# Altium PCB air qulity monitor.PcbDoc
Units mil, origin at the board's own origin, x right, y up, seen from the top; angles counter-clockwise.
Board outline 2860 x 2155 mil, 2 copper layers (Top Layer, Bottom Layer); 23 components, 21 nets, 103 pads, 17 vias.
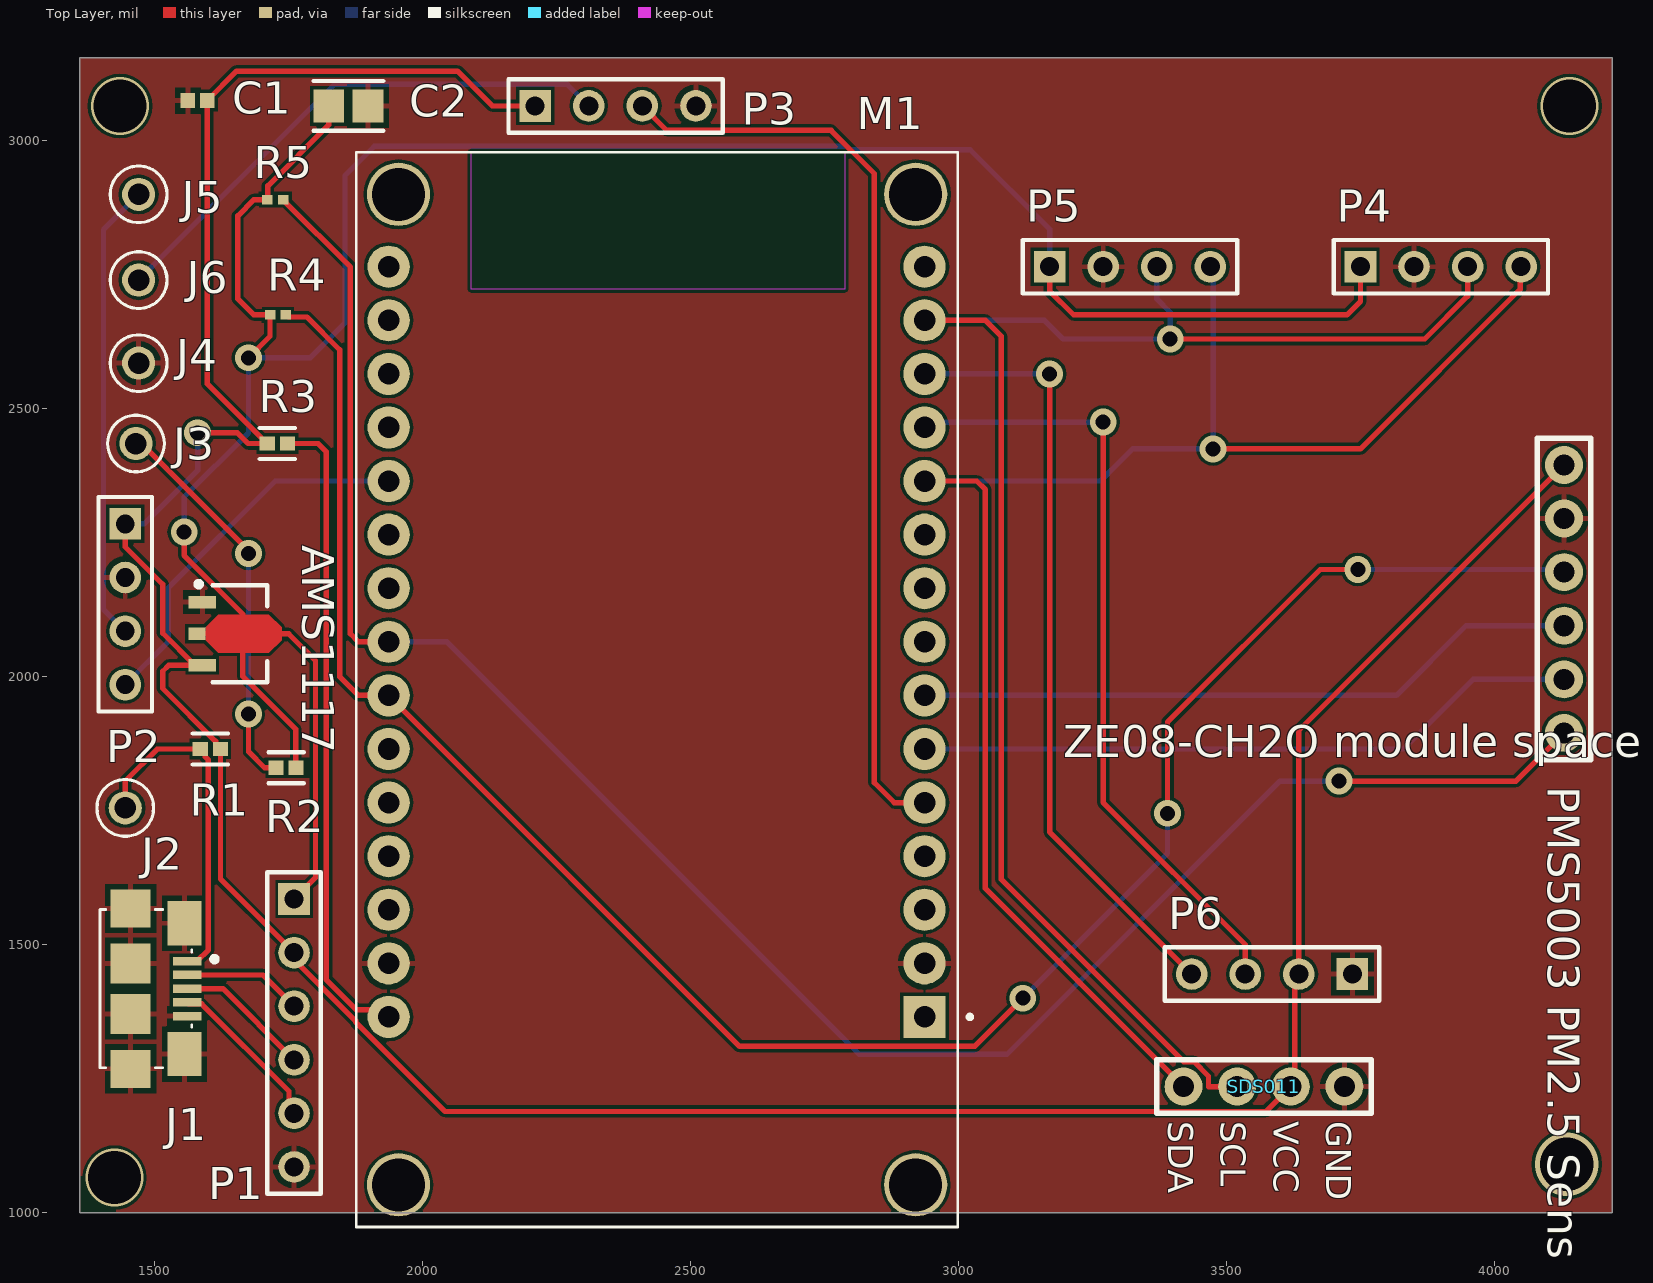
[diagram p0: Top Layer view]
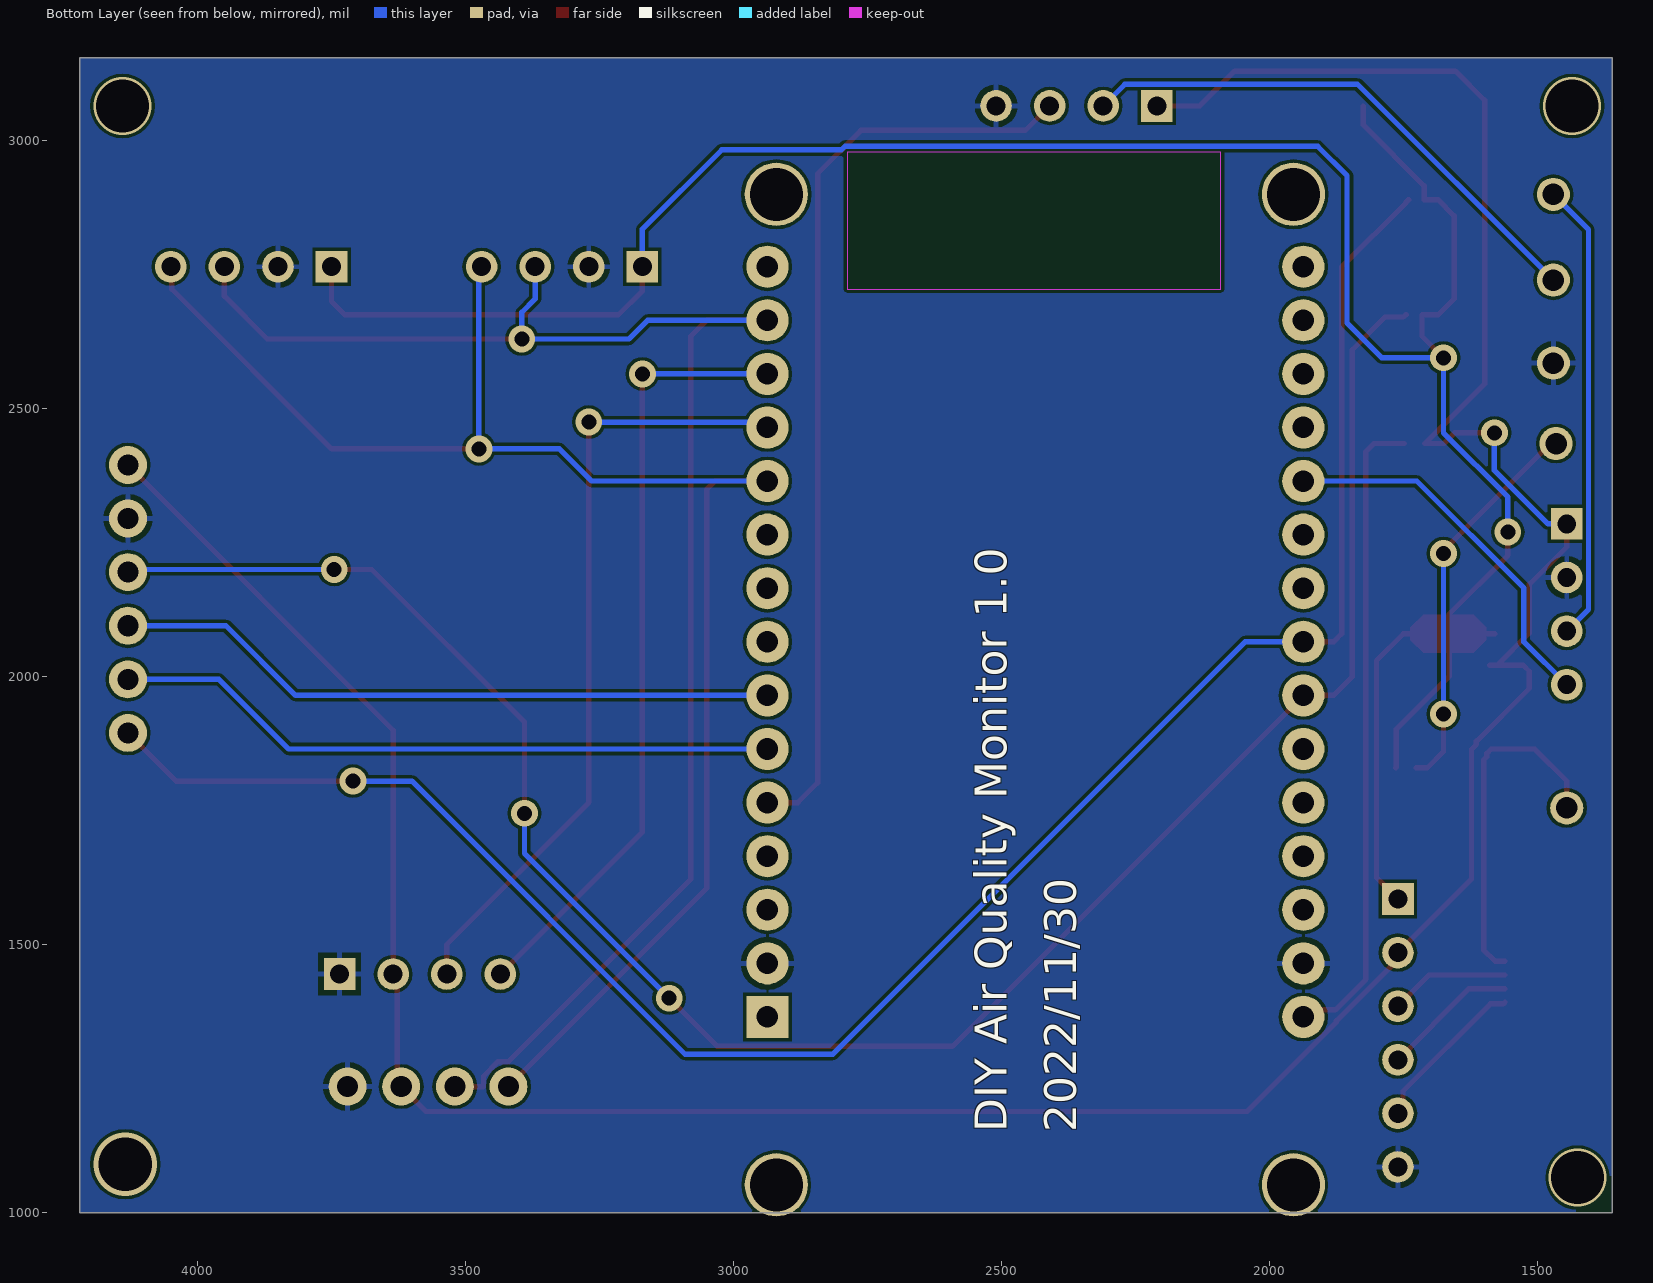
[diagram p1: Bottom Layer view, seen from below]
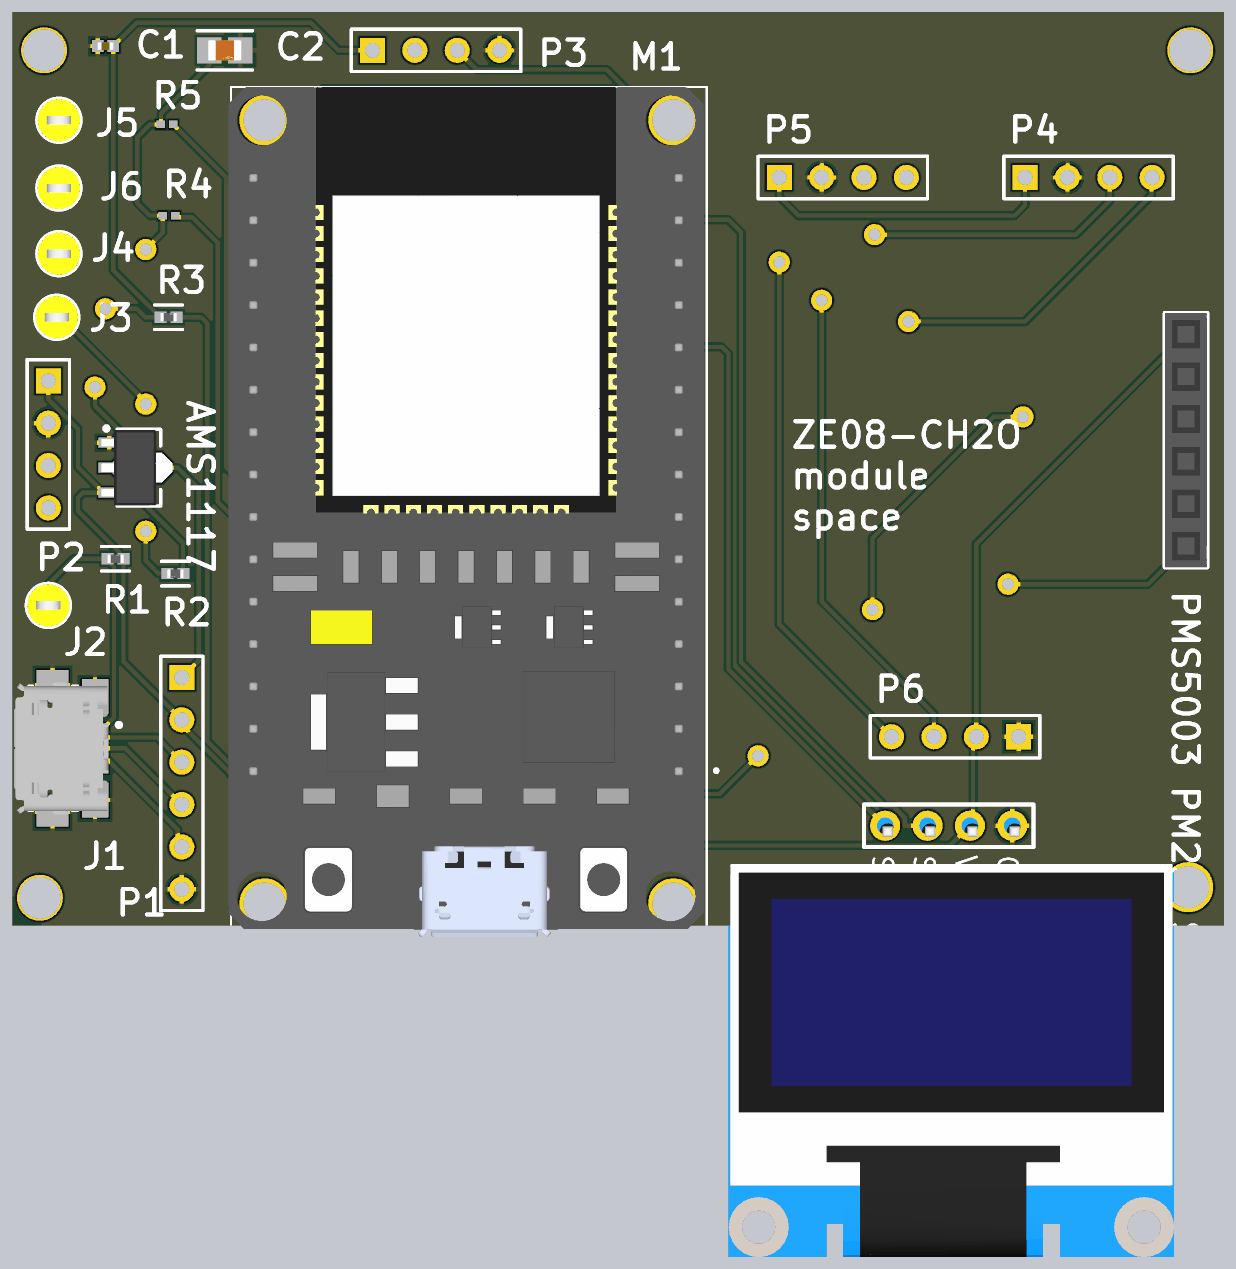
[diagram p2: 3D render of the assembled board from above, using the file's embedded part models]

## Layer stack, top to bottom
Top Solder: solder mask 0.4, Solder Resist, Dk 3.5
Top Layer: signal copper 1.4
Dielectric 1: dielectric 12.6, FR-4, Dk 4.8
Bottom Layer: signal copper 1.4
Bottom Solder: solder mask 0.4, Solder Resist, Dk 3.5

## Board outline
1360,1000 4220,1000 4220,3155 1360,3155

## Design rules (kind name [scope] priority, off if disabled: settings)
Clearance [All] p1: gap=5.98 ignorepadtopadclearanceinfootprint=FALSE
MinimumSolderMaskSliver [All] p1: minsoldermaskwidth=0.98
PolygonConnect [All] p1: connectstyle=Relief reliefconductorwidth=10 reliefentries=4 polygonreliefangle="90 Angle" airgapwidth=10
RoutingVias [All] p1: holewidth=28 width=50 viastyle="Through Hole" minholewidth=28 minwidth=50 maxholewidth=28 maxwidth=50
SilkToSilkClearance [All] p1: silktosilkclearance=1
SilkToSolderMaskClearance [IsPad] p1: minsilkscreentomaskgap=5 clearancetoexposedcopper=TRUE
SolderMaskExpansion [All] p1: expansion=4.02
Width [All] p1: maxlimit=12.01 minlimit=5.98 preferedwidth=10
27 further rules are at their usual default settings.

## Classes and differential pairs
component class "air qulity monitor": J5 J6 M1 P1 P2 P3 P4 P5 P6 "PMS5003 PM2.5 Sensor" R3 R4 R5 SDS011
component class "5V to 3.3V regulator": AMS1117 C1 C2 J1 J2 J3 J4 J? R1 R2

## Components (designator, comment, footprint, x,y, rotation, side; value= is the part's Value field where it differs from the comment)
AMS1117 "IC1" SOT89-150P350X150-3N 1650,2080 r0 top
C1 "10uF" CAPC1005X70N 1580,3075 r0 top
C2 "22uF" FP-GRM219-0_2-0_15-IPC_A 1861.45,3065 r0 top
J1 "10118192-0001LF" AMPHENOL_10118192-0001LF 1560.32,1417.76 r270 top
J2 "5004" FP-5004-MFG 1445,1755 r0 top
J3 "5004" FP-5004-MFG 1465,2435 r0 top
J4 "5004" FP-5004-MFG 1470,2585 r0 top
J5 "5004" FP-5004-MFG 1470,2900 r0 top
J6 "5004" FP-5004-MFG 1470,2740 r0 top
M1 "ESP32-WROOM-32" ESP32-DEVKIT-V1 2460.24,1968.94 r180 top
P1 "Header 6" HDR1X6 1760,1585 r270 top
P2 "MQ7 sensor Header" HDR1X4 1445,2285 r270 top
P3 "MQ131 sensor Header" HDR1X4 2210,3065 r0 top
P4 "Si7021 Sensor Header" HDR1X4 3750,2765 r0 top
P5 "SGP30 Sensor Header" HDR1X4 3170,2765 r0 top
P6 "ZE08-CH2O sensor Header" HDR1X4 3735,1445 r180 top
"PMS5003 PM2.5 Sensor" "PMS5003 PM2.5 Sensor" "PMS5003 PM2.5 Sensor" 4130,2145 r0 top
R1 "0R" FP-RC0402-0_4-IPC_A 1603.84,1865 r0 top
R2 "0R" FP-RC0402-0_4-IPC_A 1745,1830 r180 top
R3 "0R" FP-RC0402-0_4-IPC_A 1728.84,2435 r0 top
R4 "10kΩ" RESC1005X40X25LL05T10 1730,2675 r180 top value=10kO
R5 "10kΩ" RESC1005X40X25LL05T10 1724.76,2890 r180 top value=10kO
SDS011 "Pin Header x4 - Display" dispay 3720,1235 r270 top

## Footprints (in the part's own frame and the unit in brackets; to place one, negate y for a bottom-side part, rotate by r counter-clockwise, add the part's x,y. Pads: shape width x height; smd on the part's side, far side on the other; paste and mask are expansions set on the pad)
AMPHENOL_10118192-0001LF [mm]
  rect 0.4x1.35 smd: 1(-1.3,0) 2(-0.65,0) 3(0,0) 4(0.65,0) 5(1.3,0)
  rect 2.1x1.6 smd: SH1(-3.1,-0.125) SH2(3.1,-0.125)
  rect 1.8x1.9 smd: SH3(-3.8,-2.675) SH6(3.8,-2.675)
  rect 1.9x1.9 smd: SH4(-1.2,-2.675) SH5(1.2,-2.675)
  silkscreen extent -3.75,-4.13 3.75,1.4, body extent -3.94,-4.99 3.98,0.67, height 3.09
CAPC1005X70N [mm]
  rect 0.69x0.72 smd: 1(-0.46,0) 2(0.46,0)
  body extent -0.5,-0.25 0.5,0.25, height 0.7
dispay [mm] "Pin Header x4 - Display"
  round 1.8 hole 1: GND(0,0) SCL(0,-5.08) SDA(0,-7.62) VCC(0,-2.54)
  silkscreen extent -1.27,-8.89 1.27,1.27, body extent -2,-17 25.86,9.7, height 1.47
ESP32-DEVKIT-V1 [mm]
  rect 2x2 hole 1.02: 1(-12.098,15.341)
  round 2 hole 1.02: 2(-12.098,12.801) 3(-12.098,10.261) 4(-12.098,7.721) 5(-12.098,5.181) 6(-12.098,2.641) 7(-12.098,0.101) 8(-12.098,-2.439) 9(-12.098,-4.979) 10(-12.098,-7.519) 11(-12.098,-10.059) 12(-12.098,-12.599) 13(-12.098,-15.139) 14(-12.098,-17.679) 15(-12.098,-20.219) 16(13.302,-20.219) 17(13.302,-17.679) 18(13.302,-15.139) 19(13.302,-12.599) 20(13.302,-10.059) 21(13.302,-7.519) 22(13.302,-4.979) 23(13.302,-2.439) 24(13.302,0.101) 25(13.302,2.641) 26(13.302,5.181) 27(13.302,7.721) 28(13.302,10.261) 29(13.302,12.801) 30(13.302,15.341)
  round 3 hole 2.517 unplated: ""(-11.678,23.301) ""(-11.678,-23.649) ""(12.832,23.301) ""(12.832,-23.649)
  Keep-Out Layer region: 9.382,-25.649 -8.308,-25.649 -8.308,-19.159 9.382,-19.159
  Keep-Out Layer region: 9.382,-25.649 -8.308,-25.649 -8.308,-19.159 9.382,-19.159
  Keep-Out Layer region: 9.382,-25.649 -8.308,-25.649 -8.308,-19.159 9.382,-19.159
  silkscreen extent -14.35,-25.65 14.83,25.3, body extent -13.5,-25.63 15,25.3, height 7.2
FP-5004-MFG [mm]
  round 1.57 hole 1.02 paste-1000 mask+0: 1(0,0)
  silkscreen extent -1.35,-1.34 1.35,1.34, body extent -1.45,-1.45 1.45,1.45, height 0.25
FP-GRM219-0_2-0_15-IPC_A [mil]
  rect 57.27x61.27 smd paste+0 mask+0: 1(-36.45,0) 2(36.45,0)
  silkscreen extent -65,-46 65,46, body extent -85,-50 85,50, height 10
FP-RC0402-0_4-IPC_A [mil]
  rect 28.16x26.48 smd paste+0 mask+0: 1(-18.84,0) 2(18.84,0)
  silkscreen extent -33,-29 33,29, body extent -41,-21 41,21, height 10
HDR1X4 [mm] "Connector; Header; 4 Position"
  rect 1.5x1.5 hole 0.9: 1(0,0)
  round 1.5 hole 0.9: 2(2.54,0) 3(5.08,0) 4(7.62,0)
  silkscreen extent -1.27,-1.27 8.89,1.27
HDR1X6 [mm] "Connector; Header; 6 Position"
  rect 1.5x1.5 hole 0.9: 1(0,0)
  round 1.5 hole 0.9: 2(2.54,0) 3(5.08,0) 4(7.62,0) 5(10.16,0) 6(12.7,0)
  silkscreen extent -1.27,-1.27 13.97,1.27
"PMS5003 PM2.5 Sensor" [mm] "PMS5003 PM2.5 Sensor"
  round 1.8 hole 1: GND(0,3.81) RESET(0,-6.35) RX(0,-1.27) SET(0,1.27) TX(0,-3.81) VCC(0,6.35)
  silkscreen extent -1.27,-7.62 1.27,7.62, body extent -1.27,-7.62 1.27,7.62, height 8.5
RESC1005X40X25LL05T10 [mm] "Chip Resistor, 2-Leads, Body 1.00x0.50mm, IPC High Density"
  rect 0.5x0.45 smd: 1(-0.375,0) 2(0.375,0)
  body extent -0.53,-0.27 0.53,0.28, height 0.4
SOT89-150P350X150-3N [mm] "SOT89, 3-Leads, Body 4.50x2.50mm, Pitch 1.50mm, Lead Span 3.5mm, IPC Medium Density"
  rect 1.3x0.6 smd: 1(-1.55,1.5) 3(-1.55,-1.5)
  rect 0.8x0.6 smd: 2(-1.8,0)
  Top Layer region: -1.4,0.3 -0.8,0.9 1.6,0.9 2.2,0.3 2.2,-0.3 1.6,-0.9 -0.8,-0.9 -1.4,-0.3
  silkscreen extent -1.85,-2.3 1.53,2.47, body extent -2.02,-2.27 2.22,2.27, height 1.5

## Part data
AMS1117: library part IC?, "75dB@(120Hz) 1A 1.25V@(1A) ±125?@(Tj) Fixed 3.3V~3.3V Positive 1 20V SOT-89 Linear Voltage Regulators (LDO) ROHS", LCSC Part #=C2904742, Manufacturer=YONGYUTAI, Mfr. Part #=AMS1117-3.3, Package=SOT-89, Datasheet=https://datasheet.lcsc.com/lcsc/2110121330_YONGYUTAI-AMS1117-3-3_C2904742.pdf
C1: library part CL05A106MQ5NUNC, "6.3V 10uF X5R ±20% 0402 Multilayer Ceramic Capacitors MLCC - SMD/SMT ROHS", LCSC Part #=187-CL05A106MQ5NUNC, Manufacturer="Samsung Electro-Mechanics", Package=0402, Datasheet Link=https://datasheet.datasheetarchive.com/originals/distributors/Datasheets-DGA10/2406160.pdf, Mfr. Part #=CL05A106MQ5NUNC
C2: library part CMP-06035-056251-1, "Chip Multilayer Ceramic Capacitors for General Purpose, 0805, 22uF, X5R, 15%, 20%, 16V", LCSC Part #=C162295, Manufacturer="Murata Electronics", Mfr. Part #=GRM219R61C226ME15L, Package=0805, Datasheet=https://datasheet.lcsc.com/lcsc/1811141821_Murata-Electronics-GRM219R61C226ME15L_C162295.pdf
J1: "Single Port 5 Contact Horizontal Right Angle Shielded Micro B USB 2.0 Connector", Package=None, Availability=Unavailable, MP=10118192-0001LF, Price=None
J2 J3 J4 J5 J6: library part CMP-2000-05575-2, "PC TEST POINT MINIATURE YELLOW", LCSC Part #=C2906762, Manufacturer=Keystone, ComponentLink2Description=Datasheet, ComponentLink2URL=https://www.keyelco.com/product-pdf.cfm?p=1313, Datasheet=https://datasheet.lcsc.com/lcsc/2201121200_Keystone-5004_C2906762.pdf, Mfr. Part #=5004, Package=5004
M1: library part ESP32-DEVKIT-V1, "Dual core, Wi-Fi: 2.4 GHz up to 150 Mbits/s,BLE (Bluetooth Low Energy) and legacy Bluetooth, 32 bits, Up to 240 MHz"
P1: "Header, 6-Pin", LatestRevisionDate=17-Jul-2002, LatestRevisionNote="Re-released for DXP Platform.", Publisher="Altium Limited"
P2 P3 P4 P5 P6: library part "Header 4", "Header, 4-Pin", LatestRevisionDate=17-Jul-2002, LatestRevisionNote="Re-released for DXP Platform.", Publisher="Altium Limited"
R1 R2 R3: library part CMP-2002-07342-2, "RES SMD 0 OHM JUMPER 1/16W 0402", LCSC Part #=C106231, Manufacturer=Yageo, Mfr. Part #=RC0402FR-070RL, Package=0402, Datasheet=https://www.lcsc.com/product-detail/Chip-Resistor-Surface-Mount_YAGEO-RC0402FR-070RL_C106231.html
R4 R5: library part CMP-2002-07353-1, "62.5mW 50V ±100ppm/? ±1% -55?~+155? 10kO 0402 Chip Resistor - Surface Mount ROHS", LCSC Part #=C60490, Manufacturer="Yageo / Phycomp", Mfr. Part #=RC0402FR-0710KL, Package=0402, Datasheet=https://datasheet.lcsc.com/lcsc/1809301715_YAGEO-RC0402FR-0710KL_C60490.pdf

## Via types
v1: diameter 50, hole 28, Top Layer to Bottom Layer, 13 vias
v2: diameter 108.11, hole 99.11, Top Layer to Bottom Layer, 3 vias
v3: diameter 118.11, hole 99.11, Top Layer to Bottom Layer, 1 vias

## Nets (pads, with @x,y where several pads share a name; then routed paths per layer and width w, separated by ;. In a path a pad name is that pad's centre, name@x,y a point inside that pad or via, vN(x,y) a via of type N, cw(c..) or ccw(c..) an arc to the next point about the centre after c; other vN are vias at no path point)
3.3V: AMS1117.2 C2.1 P1.1 P4.1 P5.1 R2.1 R4.2 R5.2 | length 4892
  Top Layer w10: v1(1555,2270) 1555,2225.97 1664.57,2116.4 1664.57,2080 ; AMS1117.2 1664.57,2080 ; v1(1675,2595) 1715.24,2635.24 R4.2 1685,2675 1655,2705 1655,2860 1685,2890 R5.2 1710.98,2890 1710.98,2915.98 1825,3030 C2.1 ; P1.1 1800,1625 1800,2030 1750,2080 1664.57,2080 ; R2.1 1763,1830.84 1763,1902 1664.57,2000.43 1664.57,2080 ; P5.1 3170,2720 3215,2675 3725,2675 3750,2700 P4.1
  Bottom Layer w10: v1(1555,2270) 1555,2335 1675,2455 v1(1675,2595) 1790,2595 1855,2660 1855,2935 1909.72,2989.72 2791.87,2989.72 2798.31,2983.29 3021.71,2983.29 3170,2835 P5.1
5V: "PMS5003 PM2.5 Sensor.VCC" AMS1117.3 C1.2 P1.2 P2.1 P3.1 P6.2 R1.2 R3.1 SDS011.VCC | length 6138
  Top Layer w10: P2.1 1445,2242.29 1515,2172.29 1515,2081.14 AMS1117.3@1575.2,2020.94 ; v1(1580,2455) 1654.3,2455 1674.3,2435 R3.1@1709.16,2435 ; AMS1117.3 AMS1117.3@1575.2,2020.94 ; R3.1 R3.1@1709.16,2435 ; P3.1 2130,3065 2065,3130 1652.52,3130 1598.11,3075.59 C1.2 1598.11,2546.05 R3.1@1709.16,2435 ; 4130,2395 3635,1900 P6.2 3627.5,1437.5 3627.5,1242.5 SDS011.VCC 3573.58,1188.58 2041.7,1188.58 1874.84,1355.45 1874.84,1357.56 1760,1472.39 P1.2 1622.68,1622.32 R1.2 1621.84,1865 1613.6,1873.24 1613.6,1879.25 1515,1977.85 1515,2010.09 1525.86,2020.94 AMS1117.3@1575.2,2020.94
  Bottom Layer w10: P2.1 1480,2285 1580,2385 v1(1580,2455)
D+: J1.3 P1.4 | length 254.7
  Top Layer w10: J1.3 1627.24,1417.76 P1.4
D-: J1.2 P1.3 | length 223.9
  Top Layer w10: J1.2 1701.65,1443.35 P1.3
DOUT1: J5.1 P2.3 | length 858.9
  Bottom Layer w10: P2.3 1404.49,2125.51 1404.49,2834.49 J5.1
DOUT2: J6.1 P3.2 | length 1008.2
  Bottom Layer w10: J6.1 1835.51,3105.51 2269.49,3105.51 P3.2
GND: "PMS5003 PM2.5 Sensor.GND" AMS1117.1 C1.1 C2.2 J1.5 J1.SH1 J1.SH2 J1.SH3 J1.SH4 J1.SH5 J1.SH6 J4.1 M1.2 M1.29 P1.6 P2.2 P3.4 P4.2 P5.2 P6.1 SDS011.GND
ID: J1.4 P1.5 | length 304.2
  Top Layer w10: J1.4 1563.19,1389.29 1587.58,1389.29 1750.61,1226.26 1750.61,1194.39 P1.5
NetJ1_1: J1.1 J2.1 R1.1 | length 645
  Top Layer w10: J2.1 1445,1805 1505,1865 R1.1 1585.84,1865 1594.08,1856.76 1594.08,1850.75 1600,1844.83 1600,1489.92 1579.02,1468.94 J1.1
NetJ3_1: J3.1 R2.2 | length 731.4
  Top Layer w10: J3.1 1475,2435 1675,2235 v1(1675,2230) ; v1(1675,1930) 1675,1860 1705,1830 R2.2
  Bottom Layer w10: v1(1675,1930) v1(1675,2230)
NetM1_5: M1.5 P3.3 | length 1730.8
  Top Layer w10: P3.3 2455.55,3019.45 2762.15,3019.45 2842.76,2938.83 2842.76,1802.24 2880.04,1764.96 M1.5
NetM1_6: "PMS5003 PM2.5 Sensor.TX" M1.6 | length 1247.3
  Bottom Layer w10: M1.6 3829.96,1864.96 3960,1995 4130,1995
NetM1_7: "PMS5003 PM2.5 Sensor.RX" M1.7 | length 1247.3
  Bottom Layer w10: M1.7 3817.36,1964.96 3947.39,2095 4130,2095
NetM1_12: M1.12 P6.3 | length 1491.6
  Top Layer w10: M1.12 M1.12@2946.57,2475 ; v1(3270,2475) 3270,1765 3535,1500 P6.3
  Bottom Layer w10: M1.12 2946.57,2475 v1(3270,2475)
NetM1_13: M1.13 P6.4 | length 1463.2
  Top Layer w10: v1(3170,2565) 3170,1710 P6.4
  Bottom Layer w10: M1.13 v1(3170,2565) v1(3170,2565)
NetM1_20: M1.20 P2.4 | length 707.5
  Bottom Layer w10: P2.4 1525,2065 1525,2165 1724.96,2364.96 M1.20
NetM1_23: "PMS5003 PM2.5 Sensor.RESET" M1.23 R5.1 | length 3746.2
  Top Layer w10: R5.1 1740.51,2890 1744.37,2886.14 1744.37,2885.16 1865,2764.53 1865,2080 1880.04,2064.96 M1.23 ; M1.23@1905,2055 M1.23@1950,2055 ; v1(3710,1805) 4040,1805 4130,1895
  Bottom Layer w10: M1.23 2045.04,2064.96 2815,1295 3090,1295 3600,1805 v1(3710,1805)
NetM1_24: "PMS5003 PM2.5 Sensor.SET" M1.24 R4.1 | length 3822.2
  Top Layer w10: R4.1 1745.75,2675 1749.61,2671.14 1783.86,2671.14 1845,2610 1845,2000 1880.04,1964.96 M1.24 2591.5,1310 3030,1310 v1(3120,1400) ; v1(3390,1745) 3390,1915 3675,2200 v1(3745,2200)
  Bottom Layer w10: v1(3120,1400) 3390,1670 v1(3390,1745) ; v1(3745,2200) 4125,2200 4130,2195
NetM1_30: M1.30 R3.2 | length 1209.1
  Top Layer w10: R3.2 1805,2435 1820,2420 1820,1435 1876.89,1378.11 1923.38,1378.11 M1.30
SCL: M1.14 P4.3 P5.3 SDS011.SCL | length 3042.2
  Top Layer w10: M1.14 3050.04,2664.96 3080,2635 3080,1621.42 3420,1281.42 3439.23,1281.42 3466.42,1254.23 3466.42,1235 SDS011.SCL ; v1(3395,2630) 3870,2630 3950,2710 P4.3
  Bottom Layer w10: M1.14 3160.04,2664.96 3195,2630 v1(3395,2630) 3395,2680 3370,2705 P5.3
SDA: M1.11 P4.4 P5.4 SDS011.SDA | length 3032
  Top Layer w10: M1.11 3034.01,2364.96 3050,2348.97 3050,1605 SDS011.SDA ; v1(3475,2425) 3750,2425 4048.18,2723.18 4048.18,2763.18 P4.4
  Bottom Layer w10: M1.11 3264.96,2364.96 3325,2425 v1(3475,2425) 3475,2760 P5.4
pads on no net: M1. M1.1 M1.3 M1.4 M1.8 M1.9 M1.10 M1.15 M1.16 M1.17 M1.18 M1.19 M1.21 M1.22 M1.25 M1.26 M1.27 M1.28
copper on no net:
  other v2: 1425,1065 1435,3065 4140,3065
  other v3: 4135,1090

## Polygon pours and split planes (outlines as drawn)
GND on Top Layer "GND_L01_P001" (solid, pour order 1): 1360,1000 4220,1000 4220,3155 1360,3155
GND on Bottom Layer "GND_L02_P000" (solid, pour order 0): 1360,1000 4220,1000 4220,3155 1360,3155

## Silkscreen, mask and mechanical layers (free items; w line width, h text height)
Top Overlay:
  text "ZE08-CH2O module space" at 3195,1850 h60
Bottom Overlay:
  text "2022/11/30" at 2360,1150 h60 r270
  text "DIY Air Quality Monitor 1.0" at 2489.99,1150 h60 r270
Mechanical 1:
  lines w10: 1255,1063.42 1275,1003.42 ; 1255,3088.42 1275,3148.42 ; 1265,1003.42 1285,1003.42 ; 1265,3148.42 1285,3148.42 ; 1275,1800 1275,1003.42 ; 1275,2351.83 1275,3148.42 ; 1295,1063.42 1275,1003.42 ; 1295,3088.42 1275,3148.42 ; 1358.41,3205 1358.41,3225 ; 1418.41,3195 1358.41,3215 ; 1418.41,3235 1358.41,3215 ; 2510,3215 1358.41,3215 ; 3071.83,3215 4223.41,3215 ; 4163.41,3195 4223.41,3215 ; 4163.41,3235 4223.41,3215 ; 4223.41,3205 4223.41,3225 ; 1360,1000 1360,3155 4225,3155 4225,1000 1360,1000 ; 3090,1610 3090,2625 4005,2625 4005,1610 3090,1610
  text "2865 (mil)" at 2520,3179.01 h60
  text "2145 (mil)" at 1310.99,1810 h60 r90

## Text inside footprints (layer, text, board x,y; h text height)
SDS011: Top Overlay "GND" at 3686.54,1170.04 h47.24 r270; Top Overlay "VCC" at 3588.11,1170.04 h47.24 r270; Top Overlay "SCL" at 3489.68,1170.04 h47.24 r270; Top Overlay "SDA" at 3391.26,1170.04 h47.24 r270